# Altium PCB HDMI8x8_EVM.PcbDoc
Units mil, origin at the board's own origin, x right, y up, seen from the top; angles counter-clockwise.
Board outline 4950 x 3450 mil, 2 copper layers (Top Layer, Bottom Layer), stack 62 mil thick; 37 components, 146 nets, 391 pads, 64 vias.
Unrouted connection lines stored in the file: 71.
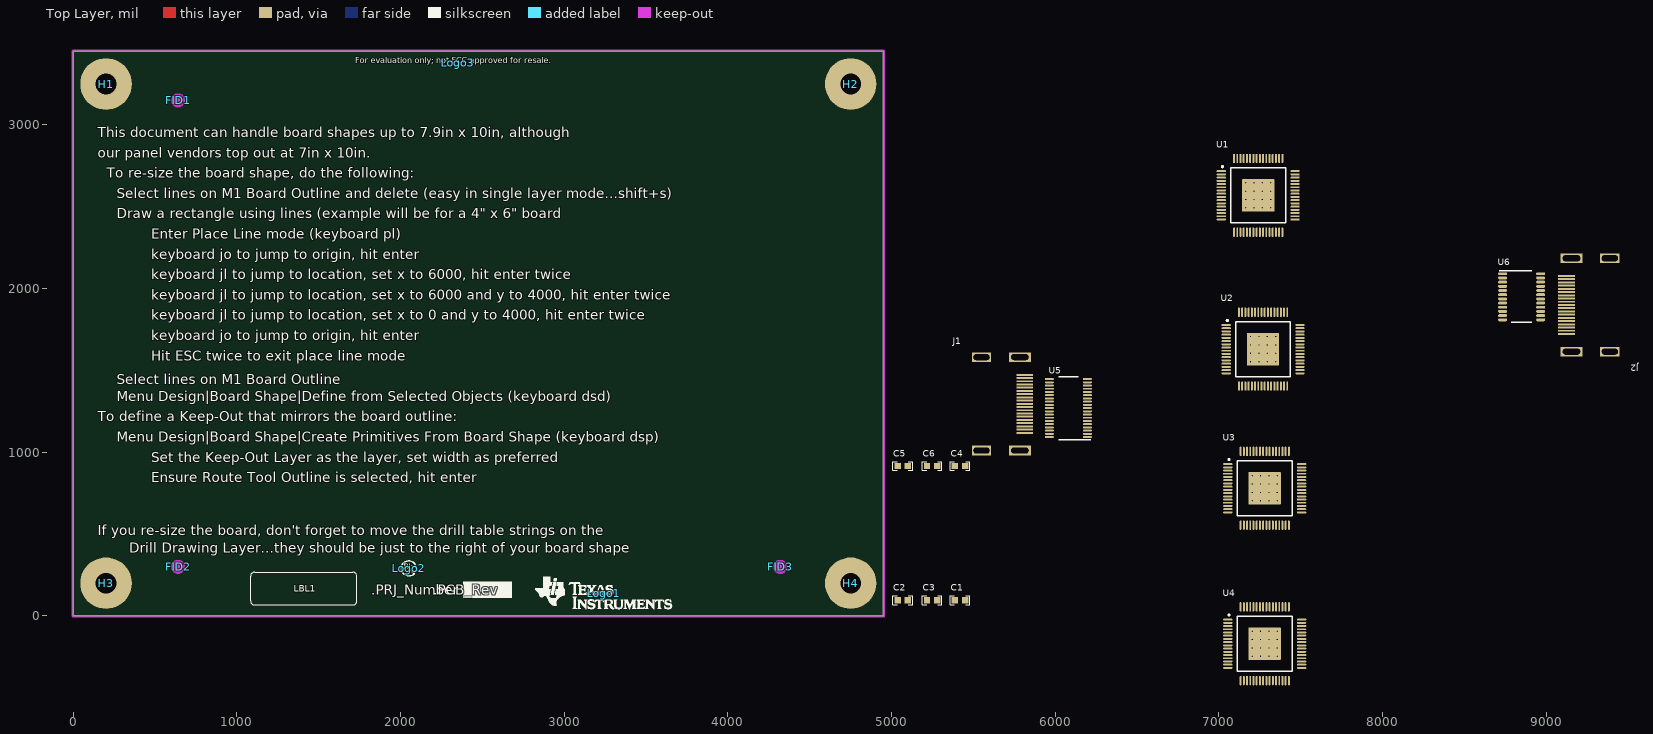
[diagram p0: Top Layer view]
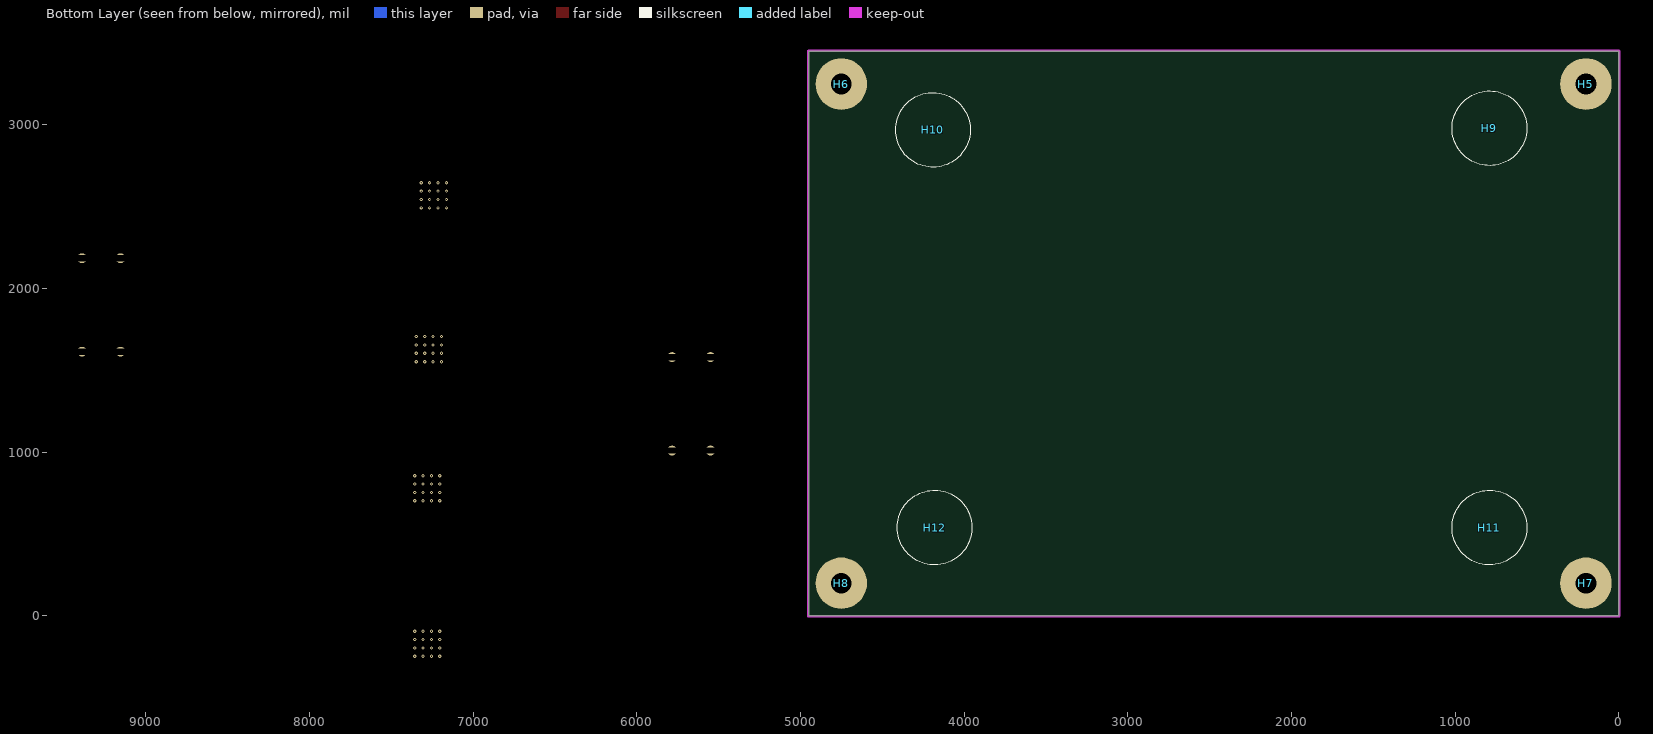
[diagram p1: Bottom Layer view, seen from below]

## Layer stack, top to bottom
Top Solder: solder mask 0.4, Solder Resist, Dk 3.5
Top Layer: signal copper 1.4
Dielectric1: core 59.2, FR-4, Dk 4.8
Bottom Layer: signal copper 1.4
Bottom Solder: solder mask 0.4, Solder Resist, Dk 3.5

## Board outline
0,0 4950,0 4950,3450 0,3450

## Design rules (kind name [scope] priority, off if disabled: settings)
AcuteAngle [All] p1: minimum=4.50000000000000E+0001 checktracksonly=FALSE
AssemblyTestPointUsage [All] p1: valid=2
Clearance Clearance_Keepouts [((IsTrack Or IsArc) And Not InPoly) And IsFree and IsKeepOut vs ((IsTrack Or IsArc) And Not InPoly) And IsFree and IsKeepOut] p1: gap=0
Clearance Clearance_BoardEdge_MountingHoles [OnCopper and InComponentClass('Mounting Holes') vs IsKeepOut] p2: gap=40
Clearance Clearance_BoardEdge_Poly [OnCopper and InPoly vs IsKeepOut] p3: gap=25
Clearance Clearance_BoardEdge [OnCopper and Not InComponentClass('Logo') and not InComponentClass('FiducialMark') and not InRegion(1000,500,4000,800) and Not IsKeepout vs IsKeepOut] p4: gap=75
Clearance Clearance_Poly [InPolygon] p5: gap=25
Clearance [All] p6: gap=7.87
ComponentClearance ComponentClearance_MountingHoles_FiducialMarks [InComponentClass('Mounting Holes') vs InComponentClass('FiducialMark')] p1: gap=50 collisioncheckmode=3 verticalgap=10 showdistances=FALSE
ComponentClearance ComponentClearance_Shunt [InComponentClass('Header') vs InComponentClass('Shunt')] p2: gap=0 collisioncheckmode=3 verticalgap=0 showdistances=FALSE
ComponentClearance ComponentClearance_Logo [InComponentClass('Logo')] p3: gap=50 collisioncheckmode=3 verticalgap=10 showdistances=FALSE
ComponentClearance ComponentClearance_ScrewToNut [(HasFootprint('NY PMS 440 0025 PH')) vs (HasFootprint('Keystone_1902C'))] p4: gap=5 collisioncheckmode=3 verticalgap=10 showdistances=FALSE
ComponentClearance ComponentClearance_MountingHoles [InComponentClass('Mounting Holes')] p5: gap=250 collisioncheckmode=3 verticalgap=100000 showdistances=FALSE
ComponentClearance ComponentClearance_SmallPassives [HasFootprint('0201*') or HasFootprint('0402*') or HasFootprint('0508') or HasFootprint('0603*') or HasFootprint('0612') or HasFootprint('0805*') or HasFootprint('0815*') or HasFootprint('0830*') or HasFootprint('1206*') or HasFootprint('1210*') or HasFootprint('1808*') or HasFootprint('1812*') or HasFootprint('1825*') or HasFootprint('2010*') or HasFootprint('2220*') or HasFootprint('2225*') or HasFootprint('2512*') or HasFootprint('2728*') or HasFootprint('3518*') vs HasFootprint('0201*') or HasFootprint('0402*') or HasFootprint('0508') or HasFootprint('0603*') or HasFootprint('0612') or HasFootprint('0805*') or HasFootprint('0815*') or HasFootprint('0830*') or HasFootprint('1206*') or HasFootprint('1210*') or HasFootprint('1808*') or HasFootprint('1812*') or HasFootprint('1825*') or HasFootprint('2010*') or HasFootprint('2220*') or HasFootprint('2225*') or HasFootprint('2512*') or HasFootprint('2728*') or HasFootprint('3518*')] p6: gap=20 collisioncheckmode=3 verticalgap=10 showdistances=FALSE
ComponentClearance ComponentClearance_THtoSMT [IsThruComponent vs IsSMTComponent] p7: gap=100 collisioncheckmode=3 verticalgap=30 showdistances=FALSE
ComponentClearance ComponentClearance_THtoTH [IsThruComponent vs IsThruComponent] p8: gap=118.11 collisioncheckmode=3 verticalgap=30 showdistances=FALSE
ComponentClearance [All] p9: gap=40 collisioncheckmode=3 verticalgap=10 showdistances=FALSE
DiffPairsRouting [All] p1: maxlimit=100 minlimit=10 mostfreqgap=10 toplayer_minwidth=15 toplayer_maxwidth=15 toplayer_prefwidth=15 bottomlayer_minwidth=15 bottomlayer_maxwidth=15 bottomlayer_prefwidth=15 maxuncoupledlength=1000
FabricationTestPointUsage TestPointUsage [All] p1: valid=2 allowmultiple=FALSE
FabricationTestpoint Testpoint [All] p1: side=3 testpointundercomponent=TRUE minsize=40 maxsize=100 preferedsize=60 minholesize=0 maxholesize=40 preferedholesize=32 testpointgrid=1 allowsidetop=TRUE allowsidebottom=TRUE usegrid=TRUE gridtolerance=0.01
FanoutControl Fanout_LCC [IsLCC] p1: bgadir=Out bgaviamode=Centered fanoutstyle=Auto fanoutdirection=Alternating viagrid=1 // Fanout_LCC (Default Rule)
FanoutControl Fanout_BGA [IsBGA] p2: bgadir=Out bgaviamode=Centered fanoutstyle=Auto fanoutdirection=Alternating viagrid=1 // Fanout_BGA (Default Rule)
FanoutControl Fanout_Default [All] p4: bgadir=Out bgaviamode=Centered fanoutstyle=Auto fanoutdirection=Alternating viagrid=1 // Fanout_Default (Default Rule)
FanoutControl Fanout_Small [(CompPinCount < 5)] p5: bgadir=Out bgaviamode=Centered fanoutstyle=Auto fanoutdirection=OutThenIn viagrid=1 // Fanout_Small (Default Rule)
HoleSize [All] p1: absolutevalues=TRUE maxlimit=251 minlimit=8 maxpercent=80.000 minpercent=20.000
MinimumAnnularRing MinimumAnnularRing_ThermalPadVias [IsVia and InAnyComponent] p1: minimumring=5.91
MinimumAnnularRing [All] p2: minimumring=9
MinimumSolderMaskSliver MinimumSolderMaskSliver_Logo [InComponentClass('Logo') vs InComponentClass('Logo')] p1: minsoldermaskwidth=0.7
MinimumSolderMaskSliver [All] p2: minsoldermaskwidth=3.94
PlaneConnect [All] p1: planeconnectstyle=Relief reliefexpansion=10 reliefentries=4 reliefconductorwidth=10 reliefairgap=10
PolygonConnect [All] p1: connectstyle=Relief reliefconductorwidth=10 reliefentries=4 polygonreliefangle="90 Angle" airgapwidth=10
RoutingVias ThermalPadVias [IsVia and InAnyComponent] p1: holewidth=7.87 width=19.68 viastyle="Through Hole" minholewidth=7.87 minwidth=19.68 maxholewidth=12.99 maxwidth=23.62
RoutingVias [All] p2: holewidth=16 width=34 viastyle="Through Hole" minholewidth=7.87 minwidth=26 maxholewidth=40 maxwidth=65
SilkToBoardRegionClearance [Not ((IsComment or IsDesignator) And (Hide <> 'False')) and not InRegion(1000,500,4000,800)] p1:
SilkToSilkClearance SilkToSilkClearance_Pb-FreeLogo [(HasFootprint('Pb-Free_Overlay_Medium') OR HasFootprint('Pb-Free_Overlay_Small')) vs (HasFootprint('Pb-Free_Overlay_Medium') OR HasFootprint('Pb-Free_Overlay_Small'))] p1: silktosilkclearance=0
SilkToSilkClearance [All] p2: silktosilkclearance=4
SilkToSolderMaskClearance SilkToComonentPadClearance [IsPad and InAnycomponent] p1: minsilkscreentomaskgap=5 clearancetoexposedcopper=TRUE
SilkToSolderMaskClearance "Silk to Solder Mask Opening" [All] p2: minsilkscreentomaskgap=4 clearancetoexposedcopper=FALSE
SolderMaskExpansion [All] p1: expansion=1.97
Width [All] p1: maxlimit=100 minlimit=6 preferedwidth=10 checkconnectedcopper=TRUE
15 further rules are at their usual default settings.

## Classes and differential pairs
net class D2OUTP[1..8]: D2OUTP1 D2OUTP2 D2OUTP3 D2OUTP4 D2OUTP5 D2OUTP6 D2OUTP7 D2OUTP8
net class D2OUTN[1..8]: D2OUTN1 D2OUTN2 D2OUTN3 D2OUTN4 D2OUTN5 D2OUTN6 D2OUTN7 D2OUTN8
component class U_HDMI8x8_OutputConnector: C4 C5 C6 J2 U6
component class Label: LBL1
component class AssemblyNote: ZZ1 ZZ2 ZZ3 ZZ4
component class FiducialMark: FID1 FID2 FID3
component class U_HDMI8x8_EVM_Hardware: FID1 FID2 FID3 H1 H2 H3 H4 H5 H6 H7 H8 H9 H10 H11 H12 LBL1 Logo1 Logo2 Logo3 ZZ1 ZZ2 ZZ3 ZZ4
component class Logo: Logo1
component class "Mounting Holes": H1 H2 H3 H4
component class U_HDMI8x8_HSSwitchSet: U1 U2 U3 U4
component class U_HDMI8x8_InputConnector: C1 C2 C3 J1 U5
net class CLKINN[1..8]: CLKINN1 CLKINN2 CLKINN3 CLKINN4 CLKINN5 CLKINN6 CLKINN7 CLKINN8
net class CLKINP[1..8]: CLKINP1 CLKINP2 CLKINP3 CLKINP4 CLKINP5 CLKINP6 CLKINP7 CLKINP8
net class CLKOUTN[1..8]: CLKOUTN1 CLKOUTN2 CLKOUTN3 CLKOUTN4 CLKOUTN5 CLKOUTN6 CLKOUTN7 CLKOUTN8
net class CLKOUTP[1..8]: CLKOUTP1 CLKOUTP2 CLKOUTP3 CLKOUTP4 CLKOUTP5 CLKOUTP6 CLKOUTP7 CLKOUTP8
net class D0INN[1..8]: D0INN1 D0INN2 D0INN3 D0INN4 D0INN5 D0INN6 D0INN7 D0INN8
net class D0INP[1..8]: D0INP1 D0INP2 D0INP3 D0INP4 D0INP5 D0INP6 D0INP7 D0INP8
net class D0OUTN[1..8]: D0OUTN1 D2OUTN2 D2OUTN3 D2OUTN4 D2OUTN5 D2OUTN6 D2OUTN7 D2OUTN8
net class D0OUTP[1..8]: D0OUTP1 D2OUTP2 D2OUTP3 D2OUTP4 D2OUTP5 D2OUTP6 D2OUTP7 D2OUTP8
net class D1INN[1..8]: D1INN1 D1INN2 D1INN3 D1INN4 D1INN5 D1INN6 D1INN7 D1INN8
net class D1INP[1..8]: D1INP1 D1INP2 D1INP3 D1INP4 D1INP5 D1INP6 D1INP7 D1INP8
net class D1OUTN[1..8]: D1OUTN1 D1OUTN2 D1OUTN3 D1OUTN4 D1OUTN5 D1OUTN6 D1OUTN7 D1OUTN8
net class D1OUTP[1..8]: D1OUTP1 D1OUTP2 D1OUTP3 D1OUTP4 D1OUTP5 D1OUTP6 D1OUTP7 D1OUTP8
net class D2INN[1..8]: D2INN1 D2INN2 D2INN3 D2INN4 D2INN5 D2INN6 D2INN7 D2INN8
net class D2INP[1..8]: D2INP1 D2INP2 D2INP3 D2INP4 D2INP5 D2INP6 D2INP7 D2INP8

## Components (designator, comment, footprint, x,y, rotation, side; value= is the part's Value field where it differs from the comment)
C1 "C0603C104M4RACTU" 0603 5418,96 r0 top
C2 "C0603C104M4RACTU" 0603 5068,96 r0 top
C3 "C0603C104M4RACTU" 0603 5248,96 r0 top
C4 "C0603C104M4RACTU" 0603 5418,916 r0 top
C5 "C0603C104M4RACTU" 0603 5068,916 r0 top
C6 "C0603C104M4RACTU" 0603 5248,916 r0 top
FID1 "Fiducial" Fiducial10-20 640,3150 r0 top
FID2 "Fiducial" Fiducial10-20 640,300 r0 top
FID3 "Fiducial" Fiducial10-20 4320,300 r0 top
H1 "NY PMS 440 0025 PH" "NY PMS 440 0025 PH" 200,3250 r0 top locked
H2 "NY PMS 440 0025 PH" "NY PMS 440 0025 PH" 4750,3250 r0 top locked
H3 "NY PMS 440 0025 PH" "NY PMS 440 0025 PH" 200,200 r0 top locked
H4 "NY PMS 440 0025 PH" "NY PMS 440 0025 PH" 4750,200 r0 top locked
H5 "1902C" Keystone_1902C 200,3250 r180 bottom locked
H6 "1902C" Keystone_1902C 4750,3250 r180 bottom locked
H7 "1902C" Keystone_1902C 200,200 r180 bottom locked
H8 "1902C" Keystone_1902C 4750,200 r180 bottom locked
H9 "SJ-5303 (CLEAR)" Bumpon_SJ5003Transparent 790,2980 r180 bottom
H10 "SJ-5303 (CLEAR)" Bumpon_SJ5003Transparent 4190,2970 r180 bottom
H11 "SJ-5303 (CLEAR)" Bumpon_SJ5003Transparent 790,540 r180 bottom
H12 "SJ-5303 (CLEAR)" Bumpon_SJ5003Transparent 4180,540 r180 bottom
J1 "CONN_HDMI_SD-47151-001" CONN_HDMI_SD-47151 5618,1296 r0 top
J2 "CONN_HDMI_SD-47151-001" CONN_HDMI_SD-47151 9320,1900 r180 top
LBL1 "Size: 0.65\" x 0.20 \"" Label_650x200 1408,167 r0 top
Logo1 "Texas Instruments" TI_Stacked_Overlay_Small 3240,140 r0 top
Logo2 "Pb-Free Symbol" Pb-Free_Overlay_Small 2050,290 r0 top
Logo3 "FCC disclaimer" FCC_disclaimer 2350,3380 r0 top
U1 "SN65LVCP408PAPR" PAP0064D_N 7240,2570 r0 top
U2 "SN65LVCP408PAPR" PAP0064D_N 7270,1630 r0 top
U3 "SN65LVCP408PAPR" PAP0064D_N 7280,780 r0 top
U4 "SN65LVCP408PAPR" PAP0064D_N 7280,-170 r0 top
U5 "TPD12S520DBTR" DBT0038A_N 6080,1270 r180 top
U6 "TPD12S016PWR" PW0024A_N 8850,1950 r0 top
ZZ1 "This Assembly Note is for PCB labels only" AssemblyNoteLabel 185,3938 r0 top
ZZ2 "These assemblies are ESD sensitive, ESD precautions shall be observed." AssemblyNote 185,3829.11 r0 top
ZZ3 "These assemblies must be clean and free from flux and all contaminants. Use of no clean flux is not acceptable." AssemblyNote 185,3740.56 r0 top
ZZ4 "These assemblies must comply with workmanship standards IPC-A-610 Class 2, unless otherwise specified." AssemblyNote 185,3652 r0 top

## Footprints (in the part's own frame and the unit in brackets; to place one, negate y for a bottom-side part, rotate by r counter-clockwise, add the part's x,y. Pads: shape width x height; smd on the part's side, far side on the other; paste and mask are expansions set on the pad)
0603 [mm] "0603 from SM-752 data"
  rect 1x0.95 smd: 1(-0.8,0) 2(0.8,0)
  silkscreen extent -1.52,-0.69 1.52,0.69, body extent -0.87,-0.47 0.87,0.47, height 1
AssemblyNote [mil] "Assembly Note"
AssemblyNoteLabel [mil] "Assembly Note for PCB Labels"
Bumpon_SJ5003Transparent [mil] "3M Hemispherical Bumpon transparent"
  round 1 on Mech4: 0(0,0)
  silkscreen extent -228,-228 228,228, body extent -217,-218 219,218, height 197
CONN_HDMI_SD-47151 [mm]
  rect 2.6x0.3 smd: 1(4.975,-4.5) 2(4.975,-4) 3(4.975,-3.5) 4(4.975,-3) 5(4.975,-2.5) 6(4.975,-2) 7(4.975,-1.5) 8(4.975,-1) 9(4.975,-0.5) 10(4.975,0) 11(4.975,0.5) 12(4.975,1) 13(4.975,1.5) 14(4.975,2) 15(4.975,2.5) 16(4.975,3) 17(4.975,3.5) 18(4.975,4) 19(4.975,4.5)
  rect 3.4x1.5 / inner round 1.524 / far side round 1.524 hole 0.9 slot 2.7 at 0 deg: 20(4.212,7.25) 23(4.212,-7.25)
  rect 3x1.5 / inner round 1.524 / far side round 1.524 hole 0.9 slot 2.5 at 0 deg: 21(-1.748,7.25) 22(-1.748,-7.25)
DBT0038A_N [mm] "TSSOP, 38-Leads, Body 9.7x4.4mm, Pitch 0.5mm, IPC Medium Density"
  oval 1.4x0.3 smd: 1(-2.95,4.5) 2(-2.95,4) 3(-2.95,3.5) 4(-2.95,3) 5(-2.95,2.5) 6(-2.95,2) 7(-2.95,1.5) 8(-2.95,1) 9(-2.95,0.5) 10(-2.95,0) 11(-2.95,-0.5) 12(-2.95,-1) 13(-2.95,-1.5) 14(-2.95,-2) 15(-2.95,-2.5) 16(-2.95,-3) 17(-2.95,-3.5) 18(-2.95,-4) 19(-2.95,-4.5) 20(2.95,-4.5) 21(2.95,-4) 22(2.95,-3.5) 23(2.95,-3) 24(2.95,-2.5) 25(2.95,-2) 26(2.95,-1.5) 27(2.95,-1) 28(2.95,-0.5) 29(2.95,0) 30(2.95,0.5) 31(2.95,1) 32(2.95,1.5) 33(2.95,2) 34(2.95,2.5) 35(2.95,3) 36(2.95,3.5) 37(2.95,4) 38(2.95,4.5)
  silkscreen extent -3.5,-4.9 1.5,4.9, body extent -3.21,-4.85 3.21,4.85, height 1.2
FCC_disclaimer [mil]
Fiducial10-20 [mm]
  round 1 smd mask+0.5: 1(0,0)
  Top Layer keep-out circle w1.178: c0,0 r0.5
Keystone_1902C [mil] "Hex Standoff, 4-40 threaded, nylon"
  body extent -145,-126 146,126, height 501
Label_650x200 [mil] "Thermal Transfer Label"
  silkscreen extent -325,-100 325,100, body extent -325,-100 325,100, height 1
"NY PMS 440 0025 PH" [mm] "4-40 nylon screw and mounting hole"
  round 8 hole 3.2: 1(0,0)
  body extent -3.3,-3.3 3.3,3.3, height 2.69
PAP0064D_N [mm] "Thin QFP, 64-Leads, Body 10x10mm, Pitch 0.5mm, Thermal Pad 5x5mm, IPC Medium Density"
  rrect100% 1.45x0.3 smd: 1(-5.725,3.75) 2(-5.725,3.25) 3(-5.725,2.75) 4(-5.725,2.25) 5(-5.725,1.75) 6(-5.725,1.25) 7(-5.725,0.75) 8(-5.725,0.25) 9(-5.725,-0.25) 10(-5.725,-0.75) 11(-5.725,-1.25) 12(-5.725,-1.75) 13(-5.725,-2.25) 14(-5.725,-2.75) 15(-5.725,-3.25) 16(-5.725,-3.75) 33(5.725,-3.75) 34(5.725,-3.25) 35(5.725,-2.75) 36(5.725,-2.25) 37(5.725,-1.75) 38(5.725,-1.25) 39(5.725,-0.75) 40(5.725,-0.25) 41(5.725,0.25) 42(5.725,0.75) 43(5.725,1.25) 44(5.725,1.75) 45(5.725,2.25) 46(5.725,2.75) 47(5.725,3.25) 48(5.725,3.75)
  rrect100% 0.3x1.45 smd: 17(-3.75,-5.725) 18(-3.25,-5.725) 19(-2.75,-5.725) 20(-2.25,-5.725) 21(-1.75,-5.725) 22(-1.25,-5.725) 23(-0.75,-5.725) 24(-0.25,-5.725) 25(0.25,-5.725) 26(0.75,-5.725) 27(1.25,-5.725) 28(1.75,-5.725) 29(2.25,-5.725) 30(2.75,-5.725) 31(3.25,-5.725) 32(3.75,-5.725) 49(3.75,5.725) 50(3.25,5.725) 51(2.75,5.725) 52(2.25,5.725) 53(1.75,5.725) 54(1.25,5.725) 55(0.75,5.725) 56(0.25,5.725) 57(-0.25,5.725) 58(-0.75,5.725) 59(-1.25,5.725) 60(-1.75,5.725) 61(-2.25,5.725) 62(-2.75,5.725) 63(-3.25,5.725) 64(-3.75,5.725)
  rrect2% 5x5 smd: 65(0,0)
  silkscreen extent -5.67,-4.25 4.25,4.57, body extent -6.01,-6.01 6.01,6.01, height 1.2
Pb-Free_Overlay_Small [mil]
  silkscreen extent -46,-46 46,46
PW0024A_N [mm] "TSOP, 24-Leads, Body 7.8x4.4mm, Pitch 0.65mm, IPC Medium Density"
  oval 1.4x0.45 smd: 1(-2.95,3.575) 2(-2.95,2.925) 3(-2.95,2.275) 4(-2.95,1.625) 5(-2.95,0.975) 6(-2.95,0.325) 7(-2.95,-0.325) 8(-2.95,-0.975) 9(-2.95,-1.625) 10(-2.95,-2.275) 11(-2.95,-2.925) 12(-2.95,-3.575) 13(2.95,-3.575) 14(2.95,-2.925) 15(2.95,-2.275) 16(2.95,-1.625) 17(2.95,-0.975) 18(2.95,-0.325) 19(2.95,0.325) 20(2.95,0.975) 21(2.95,1.625) 22(2.95,2.275) 23(2.95,2.925) 24(2.95,3.575)
  silkscreen extent -3.51,-3.95 1.6,4.04, body extent -3.21,-3.9 3.21,3.9, height 1
TI_Stacked_Overlay_Small [mil]
  silkscreen extent -418,-98 418,98

## Part data
C1 C2 C3 C4 C5 C6: "CAP, CERM, 0.1 µF, 16 V, +/- 20%, X7R, 0603"
FID1 FID2 FID3: "Fiducial mark.  There is nothing to buy or mount."
H1 H2 H3 H4: "Machine Screw, Round, #4-40 x 1/4, Nylon, Philips panhead"
H5 H6 H7 H8: "Standoff, Hex, 0.5\"L #4-40 Nylon"
H9 H10 H11 H12: "Bumpon, Hemisphere, 0.44 X 0.20, Clear"
J1 J2: "Connector, HDMI, RA, 19 pin"
LBL1: library part THT-14-423-10, "Thermal Transfer Printable Labels, 0.650\" W x 0.200\" H - 10,000 per roll"
Logo1: library part TI_Logo, "Texas Instrument Corporate Signature"
Logo2: library part Pb-Free
Logo3: library part FCC_disclaimer, "FCC_disclaimer"
U1 U2 U3 U4: "8 x 8 4.25Gbps Crosspoint Swtich, 8 TX / 8 RX, 3.3V, -40 to 85 degC, 64-Pin HTQFP (PAP), Green (RoHS & no Sb/Br)"
U5: "HDMI Receiver Port Protection and Interface Device, 12 Channels, -40 to +85 degC, 38-pin TSSOP (DBT), Green (RoHS & no Sb/Br)"
U6: "Value-Line HDMI Companion Chip for Portable Applications, 12 Channels, -40 to +85 degC, 24-pin TSSOP (PW), Green (RoHS & no Sb/Br)"
ZZ1: library part AssemblyNoteLabel
ZZ2 ZZ3 ZZ4: library part AssemblyNote

## Via types
v1: diameter 19.68, hole 7.87, Top Layer to Bottom Layer, 64 vias

## Nets (pads, with @x,y where several pads share a name; then routed paths per layer and width w, separated by ;. In a path a pad name is that pad's centre, name@x,y a point inside that pad or via, vN(x,y) a via of type N, cw(c..) or ccw(c..) an arc to the next point about the centre after c; other vN are vias at no path point)
CEC: U5.16 U6.1
CLKINN1: J1.12 U1.6 U5.15 U5.24
CLKINN2: U1.9
CLKINN3: U1.12
CLKINN4: U1.15
CLKINN5: U1.19
CLKINN6: U1.22
CLKINN7: U1.25
CLKINN8: U1.28
CLKINP1: J1.10 U1.5 U5.13 U5.26
CLKINP2: U1.8
CLKINP3: U1.11
CLKINP4: U1.14
CLKINP5: U1.18
CLKINP6: U1.21
CLKINP7: U1.24
CLKINP8: U1.27
CLKOUTN1: J2.12 U1.59 U6.16
CLKOUTN2: U1.56
CLKOUTN3: U1.53
CLKOUTN4: U1.50
CLKOUTN5: U1.42
CLKOUTN6: U1.39
CLKOUTN7: U1.36
CLKOUTN8: U1.33
CLKOUTP1: J2.10 U1.60 U6.15
CLKOUTP2: U1.57
CLKOUTP3: U1.54
CLKOUTP4: U1.51
CLKOUTP5: U1.43
CLKOUTP6: U1.40
CLKOUTP7: U1.37
CLKOUTP8: U1.34
D0INN1: J1.9 U2.6 U5.12 U5.27
D0INN2: U2.9
D0INN3: U2.12
D0INN4: U2.15
D0INN5: U2.19
D0INN6: U2.22
D0INN7: U2.25
D0INN8: U2.28
D0INP1: J1.7 U2.5 U5.10 U5.29
D0INP2: U2.8
D0INP3: U2.11
D0INP4: U2.14
D0INP5: U2.18
D0INP6: U2.21
D0INP7: U2.24
D0INP8: U2.27
D0OUTN1: J2.9 U3.59 U6.17
D0OUTN2: U3.56
D0OUTN3: U3.53
D0OUTN4: U3.50
D0OUTN5: U3.42
D0OUTN6: U3.39
D0OUTN7: U3.36
D0OUTN8: U3.33
D0OUTP1: J2.7 U3.60 U6.18
D0OUTP2: U3.57
D0OUTP3: U3.54
D0OUTP4: U3.51
D0OUTP5: U3.43
D0OUTP6: U3.40
D0OUTP7: U3.37
D0OUTP8: U3.34
D1INN1: J1.6 U3.6 U5.9 U5.30
D1INN2: U3.9
D1INN3: U3.12
D1INN4: U3.15
D1INN5: U3.19
D1INN6: U3.22
D1INN7: U3.25
D1INN8: U3.28
D1INP1: J1.4 U3.5 U5.7 U5.32
D1INP2: U3.8
D1INP3: U3.11
D1INP4: U3.14
D1INP5: U3.18
D1INP6: U3.21
D1INP7: U3.24
D1INP8: U3.27
D1OUTN1: J2.6 U4.59 U6.20
D1OUTN2: U4.56
D1OUTN3: U4.53
D1OUTN4: U4.50
D1OUTN5: U4.42
D1OUTN6: U4.39
D1OUTN7: U4.36
D1OUTN8: U4.33
D1OUTP1: J2.4 U4.60 U6.21
D1OUTP2: U4.57
D1OUTP3: U4.54
D1OUTP4: U4.51
D1OUTP5: U4.43
D1OUTP6: U4.40
D1OUTP7: U4.37
D1OUTP8: U4.34
D2INN1: J1.3 U4.6 U5.6 U5.33
D2INN2: U4.9
D2INN3: U4.12
D2INN4: U4.15
D2INN5: U4.19
D2INN6: U4.22
D2INN7: U4.25
D2INN8: U4.28
D2INP1: J1.1 U4.5 U5.4 U5.35
D2INP2: U4.8
D2INP3: U4.11
D2INP4: U4.14
D2INP5: U4.18
D2INP6: U4.21
D2INP7: U4.24
D2INP8: U4.27
D2OUTN1: J2.3 U2.59 U6.22
D2OUTN2: U2.56
D2OUTN3: U2.53
D2OUTN4: U2.50
D2OUTN5: U2.42
D2OUTN6: U2.39
D2OUTN7: U2.36
D2OUTN8: U2.33
D2OUTP1: J2.1 U2.60 U6.23
D2OUTP2: U2.57
D2OUTP3: U2.54
D2OUTP4: U2.51
D2OUTP5: U2.43
D2OUTP6: U2.40
D2OUTP7: U2.37
D2OUTP8: U2.34
DDCSCL: U5.17 U6.2
DDCSDA: U5.18 U6.3
GND: C1.2 C2.2 C3.2 C4.2 C5.2 C6.2 J1.2 J1.5 J1.8 J1.11 J1.17 J2.2 J2.5 J2.8 J2.11 J2.17 U1.31 U1.32 U1.47 U1.48 U1.62 U2.31 U2.32 U2.48 U2.62 U3.31 U3.32 U3.47 U3.62 U4.31 U4.32 U4.62 U5.3 U5.5 U5.8 U5.11 U5.14 U5.25 U5.28 U5.31 U5.34 U5.36 U6.6 U6.14 U6.19
HPD: U5.19 U6.4
NetC1_1: C1.1 U5.37
NetC4_1: C4.1 J2.18 U6.13
NetJ1_13: J1.13 U5.23
NetJ1_15: J1.15 U5.22
NetJ1_16: J1.16 U5.21
NetJ1_19: J1.19 U5.20
NetJ2_13: J2.13 U6.7
NetJ2_15: J2.15 U6.8
NetJ2_16: J2.16 U6.9
NetJ2_19: J2.19 U6.10
P3V3: U1.63 U2.47 U2.63 U3.48 U3.63 U4.47 U4.48 U4.63
V3V3: C2.1 C5.1 U5.2 U6.5 U6.12 U6.24
V5V: C3.1 C6.1 J1.18 U5.1 U6.11
pads on no net: FID1.1 FID2.1 FID3.1 H1.1 H2.1 H3.1 H4.1 H9.0 H10.0 H11.0 H12.0 J1.14 J1.20 J1.21 J1.22 J1.23 J2.14 J2.20 J2.21 J2.22 J2.23 U1.1 U1.2 U1.3 U1.4 U1.7 U1.10 U1.13 U1.16 U1.17 U1.20 U1.23 U1.26 U1.29 U1.30 U1.35 U1.38 U1.41 U1.44 U1.45 U1.46 U1.49 U1.52 U1.55 U1.58 U1.61 U1.64 U1.65 U2.1 U2.2 U2.3 U2.4 U2.7 U2.10 U2.13 U2.16 U2.17 U2.20 U2.23 U2.26 U2.29 U2.30 U2.35 U2.38 U2.41 U2.44 U2.45 U2.46 U2.49 U2.52 U2.55 U2.58 U2.61 U2.64 U2.65 U3.1 U3.2 U3.3 U3.4 U3.7 U3.10 U3.13 U3.16 U3.17 U3.20 U3.23 U3.26 U3.29 U3.30 U3.35 U3.38 U3.41 U3.44 U3.45 U3.46 U3.49 U3.52 U3.55 U3.58 U3.61 U3.64 U3.65 U4.1 U4.2 U4.3 U4.4 U4.7 U4.10 U4.13 U4.16 U4.17 U4.20 U4.23 U4.26 U4.29 U4.30 U4.35 U4.38 U4.41 U4.44 U4.45 U4.46 U4.49 U4.52 U4.55 U4.58 U4.61 U4.64 U4.65 U5.38
copper on no net:
  other v1: 7203.23,-246.77 7254.41,-246.77 7305.59,-246.77 7356.77,-246.77 7203.23,-195.59 7254.41,-195.59 7305.59,-195.59 7356.77,-195.59 7203.23,-144.41 7254.41,-144.41 7305.59,-144.41 7356.77,-144.41 7203.23,-93.23 7254.41,-93.23 7305.59,-93.23 7356.77,-93.23 7203.23,703.23 7254.41,703.23 7305.59,703.23 7356.77,703.23 7203.23,754.41 7254.41,754.41 7305.59,754.41 7356.77,754.41 7203.23,805.59 7254.41,805.59 7305.59,805.59 7356.77,805.59 7203.23,856.77 7254.41,856.77 7305.59,856.77 7356.77,856.77 7193.23,1553.23 7244.41,1553.23 7295.59,1553.23 7346.77,1553.23 7193.23,1604.41 7244.41,1604.41 7295.59,1604.41 7346.77,1604.41 7193.23,1655.59 7244.41,1655.59 7295.59,1655.59 7346.77,1655.59 7193.23,1706.77 7244.41,1706.77 7295.59,1706.77 7346.77,1706.77 7163.23,2493.23 7214.41,2493.23 7265.59,2493.23 7316.77,2493.23 7163.23,2544.41 7214.41,2544.41 7265.59,2544.41 7316.77,2544.41 7163.23,2595.59 7214.41,2595.59 7265.59,2595.59 7316.77,2595.59 7163.23,2646.77 7214.41,2646.77 7265.59,2646.77 7316.77,2646.77

## Keep-outs
Keep-Out Layer:
  lines w10: -5,0 ccw(c0,0) 0,-5 ; -5,0 ccw(c0,0) 0,-5 ; -5,0 -5,3450 ; -5,3450 cw(c0,3450) 0,3455 ; -5,3450 cw(c0,3450) 0,3455 ; 0,-5 4950,-5 ; 0,3455 4950,3455 ; 4950,-5 ccw(c4950,0) 4955,0 ; 4950,-5 ccw(c4950,0) 4955,0 ; 4950,3455 cw(c4950,3450) 4955,3450 ; 4950,3455 cw(c4950,3450) 4955,3450 ; 4955,0 4955,3450
  text ".Layer_Name" at 577,-858.49 h60

## Other copper
Top Layer:
  text ".Layer_Name" at 577,-858.49 h60
Bottom Layer:
  text ".Layer_Name" at 577,-858.49 h60

## Silkscreen, mask and mechanical layers (free items; w line width, h text height)
Top Overlay:
  region: 2680,210 2380,210 2380,110 2680,110
  text "This document can handle board shapes up to 7.9in x 10in, although" at 150,2925 h60
  text "our panel vendors top out at 7in x 10in." at 150,2800.94 h60
  text "To re-size the board shape, do the following:" at 205,2676.88 h60
  text "Select lines on M1 Board Outline and delete (easy in single layer mode...shift+s)" at 265,2552.82 h60
  text "Draw a rectangle using lines (example will be for a 4\" x 6\" board" at 265,2428.76 h60
  text "Enter Place Line mode (keyboard pl)" at 475,2304.71 h60
  text "keyboard jo to jump to origin, hit enter" at 475,2180.65 h60
  text "keyboard jl to jump to location, set x to 6000, hit enter twice" at 475,2056.59 h60
  text "keyboard jl to jump to location, set x to 6000 and y to 4000, hit enter twice" at 475,1932.53 h60
  text "keyboard jl to jump to location, set x to 0 and y to 4000, hit enter twice" at 475,1808.47 h60
  text "keyboard jo to jump to origin, hit enter" at 475,1684.41 h60
  text "Hit ESC twice to exit place line mode" at 475,1560.35 h60
  text "Select lines on M1 Board Outline" at 265,1416.3 h60
  text "Menu Design|Board Shape|Define from Selected Objects (keyboard dsd)" at 265,1312.24 h60
  text "To define a Keep-Out that mirrors the board outline:" at 150,1188.18 h60
  text "Menu Design|Board Shape|Create Primitives From Board Shape (keyboard dsp)" at 265,1064.12 h60
  text "Set the Keep-Out Layer as the layer, set width as preferred" at 475,940.06 h60
  text "Ensure Route Tool Outline is selected, hit enter" at 475,816 h60
  text "If you re-size the board, don't forget to move the drill table strings on the" at 150,493 h60
  text "Drill Drawing Layer...they should be just to the right of your board shape" at 343,387 h60
  text ".PRJ_Number" at 1820,130.01 h60
  text ".PCB_Rev" at 2200,130.01 h60
  text "-" at 2310,130.01 h60
  text ".Layer_Name" at 577,-858.49 h60
Bottom Overlay:
  text ".Layer_Name" at 577,-858.49 h60
Top Paste:
  text ".Layer_Name" at 577,-858.49 h60
Bottom Paste:
  text ".Layer_Name" at 577,-858.49 h60
Top Solder:
  text ".Layer_Name" at 577,-858.49 h60
  text ".Layer_Name" at 577,-858.49 h60
Bottom Solder:
  text ".Layer_Name" at 577,-858.49 h60
Drill Guide:
  text ".Layer_Name" at 577,-858.49 h60
M1 Board Outline:
  the board outline again, w10
  text ".Layer_Name" at 577,-858.49 h60
M2 Board Dimensions:
  rectangle: 125,-400 500,-275
  rectangle: 0,-275 125,-150
  lines w7: 0,-275 1000,-275 ; 125,-400 125,-150 ; 250,-400 250,-150 ; 500,-400 500,-150 ; 750,-400 750,-150 ; 0,-400 0,-150 1000,-150 1000,-400 0,-400
  text ".Layer_Name" at 577,-858.49 h60
M3 3D STEP Top:
  text ".Layer_Name" at 577,-858.49 h60
M4 3D STEP Bottom:
  text ".Layer_Name" at 577,-858.49 h60
M5 Assembly Top:
  lines w10: -292,-930.17 6308,-930.17 ; -292,-726.83 6310,-726.83 ; -292,-523.5 -292,-1133.5 3713,-1133.5 6310,-1133.5 6310,-523.5 -291.5,-523.5 -291.5,-1133.5 1284,-1133.5 ; 2173,-1133.5 2173,-523.5 ; 3440,-726.83 3440,-523.5 ; 4280,-726.83 4280,-523.5 ; 4902,-1140 4902,-937.17
  text "COMPONENTS MARKED 'DNP' SHOULD NOT BE POPULATED." at 1153.5,-318.5 h60
  text "ASSEMBLY VARIANT:" at 1153,-434 h60
  text ".VariantName" at 2189,-434 h60
  text "PCB VIEWED FROM TOP SIDE" at -228.5,-655.67 h60
  text "BOARD #:" at 2248,-655.67 h60
  text ".PRJ_Number" at 2793.5,-655.67 h60
  text "REV:" at 3638,-655.67 h60
  text ".PCB_Rev" at 3929.5,-655.67 h60
  text "SVN REV:" at 4476,-655.67 h60
  text ".VersionControl_RevNumber" at 4982,-655.67 h60
  text "TID #:" at 2248,-859 h60
  text ".TID" at 2793.5,-859 h60
  text "PLOT NAME =" at -228.5,-1064.34 h60
  text ".plot_File_Name" at 577,-1064.34 h60
  text "GENERATED    :" at 2250,-1064.34 h60
  text ".Print_Date" at 3119.5,-1064.34 h60
  text ".Print_Time" at 3848.5,-1064.34 h60
  text "TEXAS INSTRUMENTS" at 5113,-1064.34 h60
M6 Assembly Bottom:
  lines w10: -292.5,-727.33 6309.5,-727.33 ; -290.5,-930.67 6309.5,-930.67 ; 1115.5,-1140.5 1115.5,-937.67 ; 1737.5,-727.33 1737.5,-524 ; 2577.5,-727.33 2577.5,-524 ; 3844.5,-1134 3844.5,-524 ; 4733.5,-1134 6309,-1134 6309,-524 -292.5,-524 -292.5,-1134 2304.5,-1134 6309.5,-1134 6309.5,-524
  text "COMPONENTS MARKED 'DNP' SHOULD NOT BE POPULATED." at 6102,-318 h60
  text ".VariantName" at 5058,-434 h60
  text "ASSEMBLY VARIANT:" at 6097,-434 h60
  text ".VersionControl_RevNumber" at 1035.5,-656.17 h60
  text "SVN REV:" at 1541.5,-656.17 h60
  text ".PCB_Rev" at 2088,-656.17 h60
  text "REV:" at 2379.5,-656.17 h60
  text ".PRJ_Number" at 3224,-656.17 h60
  text "BOARD #:" at 3769.5,-656.17 h60
  text "PCB VIEWED FROM BOTTOM SIDE" at 6246,-656.17 h60
  text ".TID" at 3224,-859.5 h60
  text "TID #:" at 3769.5,-859.5 h60
  text "TEXAS INSTRUMENTS" at 904.5,-1064.84 h60
  text ".Print_Time" at 2169,-1064.84 h60
  text ".Print_Date" at 2898,-1064.84 h60
  text "GENERATED    :" at 3767.5,-1064.84 h60
  text ".plot_File_Name" at 5440.5,-1064.84 h60
  text "PLOT NAME =" at 6246,-1064.84 h60
M9 Title Sheet:
  drawing of 57 lines, arcs and shapes, not listed
  text "1" at 739.84,8036.5 h70
  text "2" at 3235.5,8036.5 h70
  text "3" at 5724.84,8036.5 h70
  text "4" at 8231.51,8036.5 h70
  text "5" at 10730.5,8036.5 h70
  text "6" at 13235.5,8036.5 h70
  text "A" at -416.5,6893.5 h70
  text "A" at 14383.5,6893.5 h70
  text "B" at -416.5,4513.5 h70
  text "B" at 14383.5,4513.5 h70
  text "C" at -416.5,2138.5 h70
  text "C" at 14383.5,2138.5 h70
  text "PROJECT TITLE:" at 11343.5,277.5 h45
  text ".PRJ_Title" at 11393.5,144.17 h70
  text "DESIGNED FOR:" at 11343.5,-23.5 h45
  text ".PRJ_Customer" at 11393.5,-163.5 h70
  text "D" at -416.5,-231.5 h70
  text "D" at 14383.5,-231.5 h70
  text "FILE NAME:" at 11343.5,-323.5 h45
  text ".PCB_File_Name_No_Path" at 11393.5,-443.5 h70
  text "Texas Instruments (TI) and/or its licensors do not warrant the accuracy or completeness of this specification" at 6374,-605.34 h45
  text "ENGINEER:" at 11343.5,-613.5 h45
  text "LAYOUT BY:" at 12848.5,-613.5 h45
  text "or any information contained therein. TI and/or its licensors do not warrant that this design will meet" at 6329.01,-718 h45
  text ".PRJ_Engineer" at 11393.5,-768.49 h70
  text ".PCB_Layout" at 12899,-768.49 h70
  text "the specifications, will be suitable for your application or fit for any particular purpose, or will operate in" at 6329.01,-830.67 h45
  text ".Layer_Name" at 577,-858.49 h60
  text "ALTIUM DESIGNER VERSION:" at 12848.5,-923.5 h45
  text "an implementation. TI and/or its licensors do not warrant that the design is production worthy. You should" at 6329.01,-943.33 h45
  text "completely validate and test your design implementation to confirm the system functionality for your application." at 6374,-1056 h45
  text ".print_Scale" at 11393.5,-1056.83 h70
  text ".Application_BuildNumber" at 12899,-1056.83 h70
  text "1" at 739.84,-1263.5 h70
  text "2" at 3235.5,-1263.5 h70
  text "3" at 5724.84,-1263.5 h70
  text "4" at 8231.51,-1263.5 h70
  text "5" at 10730.5,-1263.5 h70
  text "6" at 13235.5,-1263.5 h70
M10 Fab Notes:
  drawing of 173 lines, arcs and shapes, not listed
  text "DESIGN INFORMATION" at 12377.02,6201 h60
  text "MIN. TRACK WIDTH:" at 11732.46,6021 h60
  text "8" at 12828.7,6021 h60
  text "MIL" at 12983.46,6021 h60
  text "MIN. CLEARANCE:" at 11732.46,5889 h60
  text "0.2" at 12768.7,5889 h60
  text "mm" at 12983.46,5889 h60
  text "MIN. VIA PAD SIZE:" at 11732.46,5757 h60
  text "24" at 12798.71,5757 h60
  text "MIL" at 12983.46,5757 h60
  text "0.05mm (2MIL)" at 12427.46,5615.29 h60
  text "MINIMUM ANNULAR RING" at 11403.23,5611 h60
  text "EXTERNAL" at 13135.46,5611 h60
  text "PER" at 11603.23,5493 h60
  text "IPC-D-275 CLASS 2 LEVEL C" at 11823.23,5493 h60
  text "MIL, HOLES" at 13311.46,5380.71 h60
  text "+/-" at 12919,5380 h60
  text "+/-" at 13773,5380 h60
  text "REGISTRATION TOLERANCES:" at 11403.23,5375 h60
  text "METAL" at 12603,5375 h60
  text "5" at 13179.2,5375 h60
  text "3" at 14012.2,5375 h60
  text "MIL" at 14128.46,5375 h60
  text "+/-" at 13773,5262 h60
  text "HOLE SIZE TOLERANCE (UNLESS OTHERWISE SPECIFIED):" at 11403.23,5257 h60
  text "3" at 14012.2,5257 h60
  text "MIL" at 14128.46,5257 h60
  text "MATERIAL:" at 11328.46,5047.54 h60
  text "FR-4 High Tg" at 12314.9,4907.21 h60
  text "FR-408" at 11749.46,4898.64 h60
  text "OTHER" at 13237.46,4898.64 h60
  text "X" at 12160,4895 h60
  text "62 MIL (1.6mm) +/-10%" at 12069.56,4735.92 h60
  text "THICKNESS:" at 11403.23,4731.64 h60
  text "X" at 11941.4,4731.64 h60
  text "OTHER" at 13354.46,4731.64 h60
  text "TOLERANCE:" at 11403.23,4573.64 h60
  text "X" at 12242.53,4573.64 h60
  text "ANSI IPC-6012 TYPE 3 CLASS 2" at 12429.48,4573.64 h60
  text "OTHER +/-" at 12429.46,4417.64 h60
  text "BOW & TWIST:" at 11403.23,4260.64 h60
  text "X" at 12242.53,4260.64 h60
  text "ANSI IPC-6012 TYPE 3 CLASS 2" at 12429.48,4260.64 h60
  text "OTHER +/-" at 12429.46,4102.13 h60
  text "DRILLING:" at 11328.46,3963.64 h60
  text "REFERENCE:" at 11403.23,3846.64 h60
  text "X" at 12051.46,3846.64 h60
  text "AS SHOWN" at 12238.46,3846.64 h60
  text "X" at 12952.46,3846.64 h60
  text "NC_DRILL FILES" at 13089.46,3846.64 h60
  text "PTH COPPER THICKNESS:" at 11403.23,3688.64 h60
  text "X" at 12533.46,3688.64 h60
  text "20-30 um" at 12670.46,3688.64 h60
  text "OTHER" at 13387.46,3688.64 h60
  text "BOARD FINISH:" at 11328.46,3529.64 h60
  text "SILKSCREEN:" at 11483.68,3411.64 h60
  text "X" at 12432.46,3411.64 h60
  text "TOP" at 12558.46,3411.64 h60
  text "X" at 12942.46,3411.64 h60
  text "BOTTOM" at 13069.46,3411.64 h60
  text "SILKSCREEN COLOR:" at 11483.68,3244.64 h60
  text "X" at 12431.42,3244.64 h60
  text "WHITE" at 12558.46,3244.64 h60
  text "OTHER" at 13069.46,3244.64 h60
  text "X" at 12562.42,3085.44 h60
  text "GREEN" at 12689.46,3085.44 h60
  text "OTHER" at 13307.46,3085.44 h60
  text "SOLDER RESIST COLOR:" at 11483.68,3074.64 h60
  text "X" at 12562.42,2915.44 h60
  text "MATTE" at 12689.46,2915.44 h60
  text "SEMI-GLOSS" at 13307,2914.8 h60
  text "IMMERSION GOLD (ENIG)" at 12389.46,2726.92 h60
  text "ENEPIG" at 13727,2723.64 h60
  text "SURFACE FINISH:" at 11328.46,2722.64 h60
  text "X" at 12202.51,2722.64 h60
  text "IMM. TIN/SILVER OR EQUIV" at 11658,2565.64 h60
  text "OTHER" at 13089.46,2565.64 h60
  text "ARRAY/PANEL:" at 11328.46,2386.64 h60
  text "CUT AND TRIM PER M1 BOARD OUTLINE" at 12389.46,2382.35 h60
  text "N.C. ROUTE" at 12389.46,2230.64 h60
  text "X" at 13068.46,2230.64 h60
  text "V. SCORE" at 13255.46,2230.64 h60
  text "CERTIFICATION:" at 11328.46,2093.64 h60
  text "MATERIALS AND WORKMANSHIP FOR ALL PCBS" at 12053.46,2093.64 h60
  text "TO MEET OR EXCEED THE REQUIREMENTS OF:" at 12053.46,1995.64 h60
  text "X" at 11679.96,1859.13 h60
  text "ANSI IPC-A-600F CLASS ->" at 11818.96,1859.13 h60
  text "X" at 13458.02,1859.13 h60
  text "2" at 13576.96,1859.14 h60
  text "1" at 13261.96,1857.64 h60
  text "3" at 13930.96,1857.64 h60
  text "X" at 12494.02,1699.64 h60
  text "RoHS" at 12630.96,1699.64 h60
  text "OTHER" at 13275.36,1699.64 h60
  text "PER ORDER" at 13672.42,1699.64 h60
  text "ALL BOARDS MUST MEET OR EXCEED UL94-V0 REQUIREMENTS." at 11356,1534 h60
  text "PCB MUST BEAR THE UL94V-0 UL REGISTERED MATERIAL ID NUMBER" at 11356,1414 h60
  text "ADDITIONAL REQUIREMENTS:" at 11328.46,1240.64 h60
  text "MICROSECTION:" at 11403.23,1125.64 h60
  text "YES" at 12308.96,1125.64 h60
  text "REQUIRED" at 13170.46,969.49 h60
  text "BARE BOARD ELEC. TEST:" at 11403.23,966.64 h60
  text "NONE" at 12708.96,966.64 h60
  text "X" at 13043.46,966.64 h60
  text "PER ORDER" at 13762.46,966.64 h60
  text ".Layer_Name" at 577,-858.49 h60
M11 Gerber Information:
  lines w10: -292,-930.17 6308,-930.17 ; -292,-726.83 6310,-726.83 ; -292,-523.5 -292,-1133.5 3713,-1133.5 6310,-1133.5 6310,-523.5 -291.5,-523.5 -291.5,-1133.5 1284,-1133.5 ; 2173,-1133.5 2173,-523.5 ; 3440,-726.83 3440,-523.5 ; 4280,-726.83 4280,-523.5 ; 4902,-1140 4902,-937.17
  text "ALL ARTWORK VIEWED FROM TOP SIDE" at -228.5,-655.67 h60
  text "BOARD #:" at 2248,-655.67 h60
  text ".PRJ_Number" at 2793.5,-655.67 h60
  text "REV:" at 3638,-655.67 h60
  text ".PCB_Rev" at 3929.5,-655.67 h60
  text "SVN REV:" at 4476,-655.67 h60
  text ".VersionControl_RevNumber" at 4982,-655.67 h60
  text "LAYER NAME =" at -228.5,-858.49 h60
  text "TID #:" at 2248,-859 h60
  text ".TID" at 2793.5,-859 h60
  text "PLOT NAME =" at -228.5,-1064.34 h60
  text ".plot_File_Name" at 577,-1064.34 h60
  text "GENERATED    :" at 2250,-1064.34 h60
  text ".Print_Date" at 3119.5,-1064.34 h60
  text ".Print_Time" at 3848.5,-1064.34 h60
  text "TEXAS INSTRUMENTS" at 5113,-1064.34 h60
M12 Stackup:
  drawing of 191 lines, arcs and shapes, not listed
  text "Layer" at 9790.34,7830 h60
  text "Name" at 10200.26,7830 h60
  text "Material" at 11130,7830 h60
  text "Thickness" at 11989.77,7830 h60
  text "Constant" at 12639.6,7830 h60
  text "Board Layer Stack" at 13209.46,7830 h60
  text "1" at 9790.34,7710 h60
  text "Top Overlay" at 10200.26,7710 h60
  text "2" at 9790.34,7590 h60
  text "Top Solder" at 10200.26,7590 h60
  text "Solder Resist" at 11130,7590 h60
  text "0.40mil" at 11989.77,7590 h60
  text "3.5" at 12639.6,7590 h60
  text "3" at 9790.34,7470 h60
  text "Top Layer" at 10200.26,7470 h60
  text "Copper" at 11130,7470 h60
  text "1.40mil" at 11989.77,7470 h60
  text "4" at 9790.34,7350 h60
  text "Dielectric1" at 10200.26,7350 h60
  text "FR-4" at 11130,7350 h60
  text "59.20mil" at 11989.77,7350 h60
  text "4.8" at 12639.6,7350 h60
  text "5" at 9790.34,7230 h60
  text "Bottom Layer" at 10200.26,7230 h60
  text "Copper" at 11130,7230 h60
  text "1.40mil" at 11989.77,7230 h60
  text "6" at 9790.34,7110 h60
  text "Bottom Solder" at 10200.26,7110 h60
  text "Solder Resist" at 11130,7110 h60
  text "0.40mil" at 11989.77,7110 h60
  text "3.5" at 12639.6,7110 h60
  text "7" at 9790.34,6990 h60
  text "Bottom Overlay" at 10200.26,6990 h60
  text ".Layer_Name" at 577,-858.49 h60
M13 Component Bodies Top:
  text ".Layer_Name" at 577,-858.49 h60
M14 Component Bodies Bottom:
  text ".Layer_Name" at 577,-858.49 h60
M15 Courtyards Top:
  text ".Layer_Name" at 577,-858.49 h60
M16 Courtyards Bottom:
  text ".Layer_Name" at 577,-858.49 h60
Drill Drawing:
  circle w10: c5683.72,3147.28 r27.63
  lines w10: 5656.09,2926.27 5711.34,2926.27 5683.72,2871.02 5656.09,2926.27 ; 5656.09,3009.15 5669.9,3009.15 5683.72,2995.34 5697.53,3009.15 5711.34,3009.15 5697.53,3022.96 5711.34,3036.78 5697.53,3036.78 5683.72,3050.59 5669.9,3036.78 5656.09,3036.78 5669.9,3022.96 5656.09,3009.15 ; 5656.09,3243.98 5683.72,3257.79 5711.34,3243.98 5697.53,3271.6 5711.34,3299.23 5683.72,3285.42 5656.09,3299.23 5669.9,3271.6 5656.09,3243.98
  lines w12: 5606,2833.72 7584.02,2833.72 ; 5606,3331 7584.02,3331 ; 5943.86,2709.4 5943.86,3455.32 ; 6275.86,2709.4 6275.86,3455.32 ; 6912.43,2709.4 6912.43,3455.32 ; 7171.57,2709.4 7171.57,3455.32 ; 5606,2709.4 7584.02,2709.4 7584.02,3455.32 5606,3455.32 5606,2709.4
  text "Symbol" at 5680.59,3368.3 h72
  text "Quantity" at 5981.16,3368.3 h72
  text "Finished Hole Size" at 6313.16,3368.3 h72
  text "Plated" at 6949.72,3368.3 h72
  text "Hole Type" at 7208.86,3368.3 h72
  text "64" at 5981.16,3243.98 h60
  text "7.87mil (0.200mm)" at 6313.16,3243.98 h60
  text "PTH" at 6949.72,3243.98 h60
  text "Round" at 7208.86,3243.98 h60
  text "4" at 5981.16,3119.66 h60
  text "125.98mil (3.200mm)" at 6313.16,3119.66 h60
  text "PTH" at 6949.72,3119.66 h60
  text "Round" at 7208.86,3119.66 h60
  text "4" at 5981.16,2995.34 h60
  text "35.43mil (0.900mm)" at 6313.16,2995.34 h60
  text "PTH" at 6949.72,2995.34 h60
  text "Slot" at 7208.86,2995.34 h60
  text "4" at 5981.16,2871.02 h60
  text "35.43mil (0.900mm)" at 6313.16,2871.02 h60
  text "PTH" at 6949.72,2871.02 h60
  text "Slot" at 7208.86,2871.02 h60
  text "76 Total" at 5981.16,2746.7 h60
  text "Slot definitions :" at 5680.59,2659.67 h60
  text "Routed Path Length" at 6131.31,2659.67 h60
  text "= Calculated from tool start centre position to tool end centre position." at 6671.05,2659.67 h60
  text "Hole Length" at 6131.31,2609.95 h60
  text "= Routed Path Length + Tool Size = Slot length as defined in the PCB layout" at 6471.24,2609.95 h60
  text ".Layer_Name" at 577,-858.49 h60

## Dimensions
0,0 to 4950,0 on M2 Board Dimensions
0,0 to 0,3450 on M2 Board Dimensions
0,-400 to 1000,-400 on M2 Board Dimensions

## Text inside footprints (layer, text, board x,y; h text height)
J1: M5 Assembly Top "PCB EDGE" at 5466.53,1190.02 h30 r90
J2: M5 Assembly Top "PCB EDGE" at 9471.47,2005.98 h30 r270
Logo2: Top Overlay "Pb" at 2020.4,271.1 h60
Logo3: Top Overlay "For evaluation only; not FCC approved for resale." at 1722.93,3366.1 h60
ZZ1: M5 Assembly Top "Install label in silkscreened box after final wash.  Text shall be 8 pt font.  Text shall be per the Label Table in the PDF schematic." at 230,3918 h40